# EAGLE board RangkaianPSU12V_&_RangkaianStepdown5v (EAGLE 9.6.2)
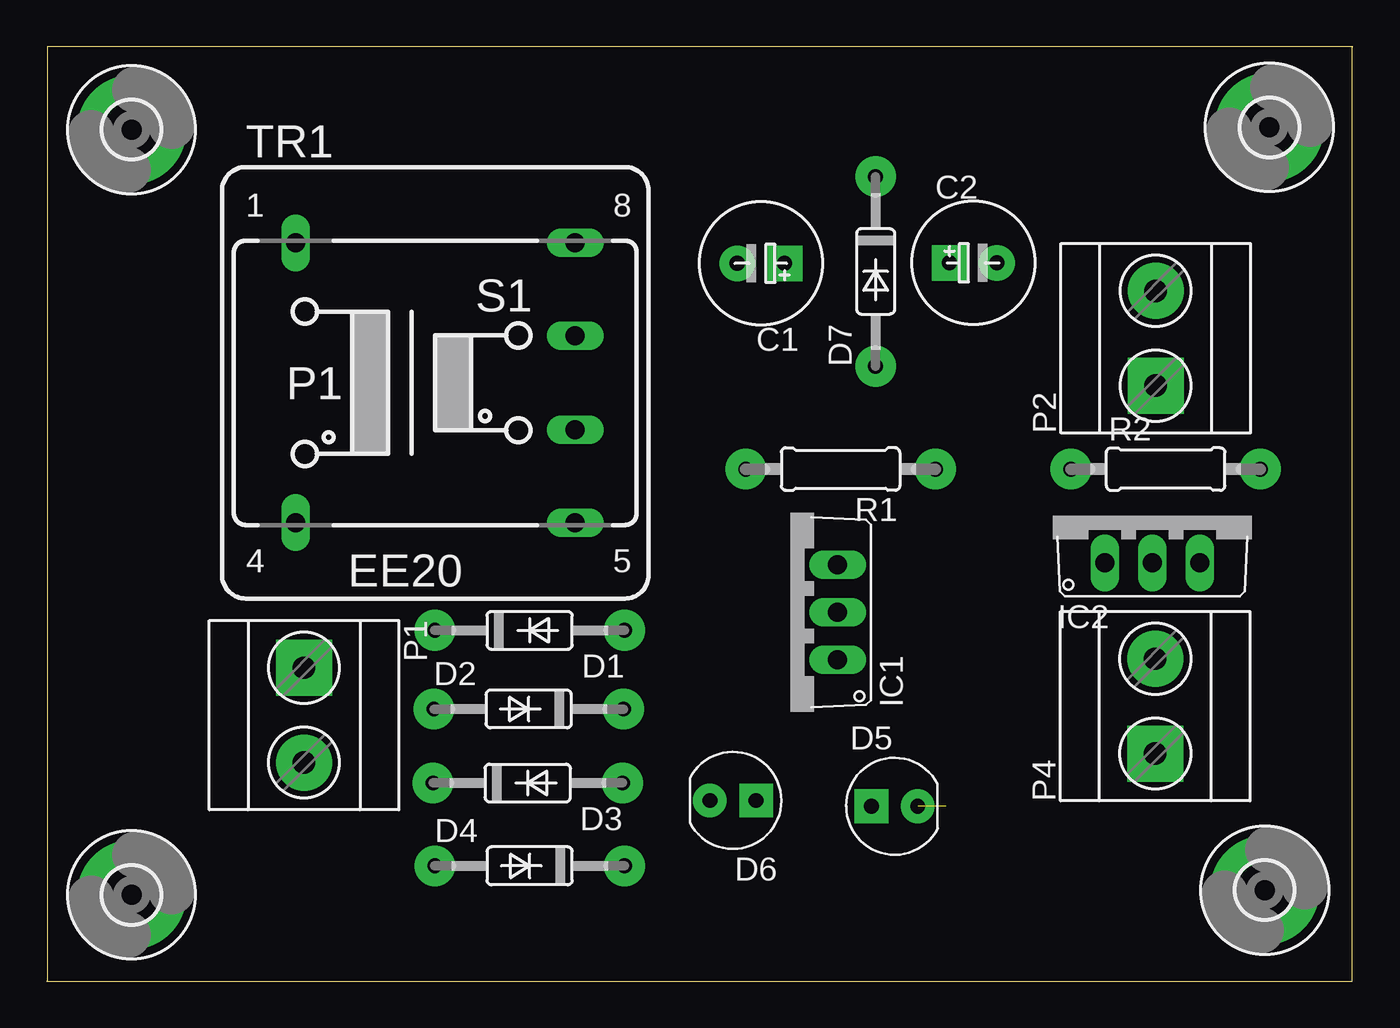
[diagram p0: board, top side]
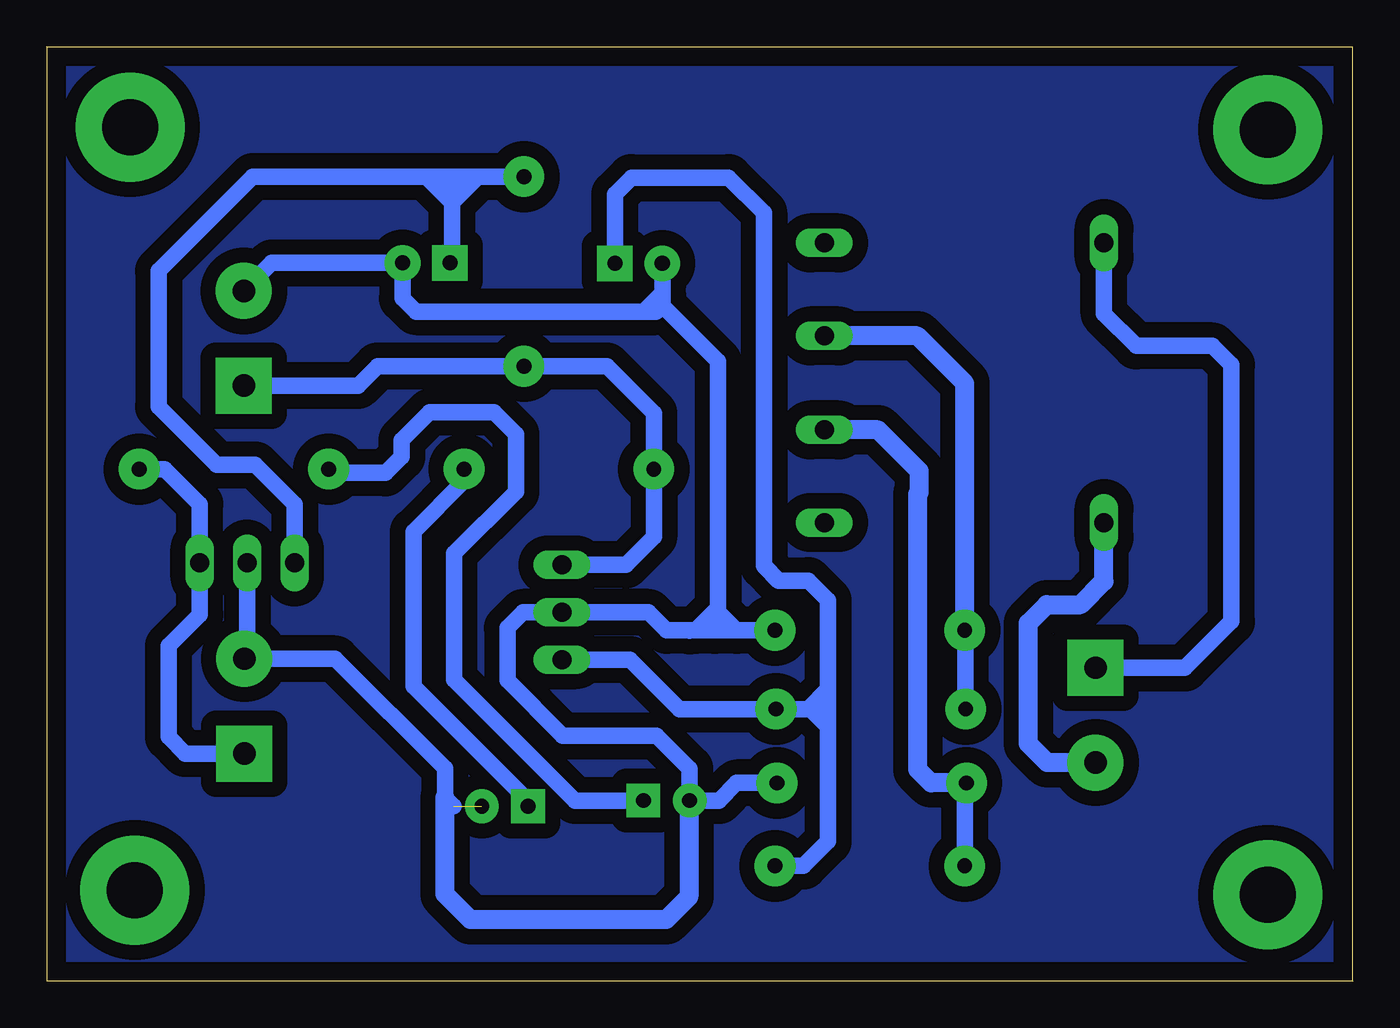
[diagram p1: board, bottom side, seen from below]

Size 70 x 50.06 mm. Coordinates in mm from the lower left corner, seen from the top.
Outline: 0,0 69.98,0 69.98,50.04 70,50.06 0.02,50.06 0.02,0.03 0,0
Copper layers (1*16): Top 0.035mm / dielectric 1.5mm / Bottom 0.035mm
Design rules "default": minimum track width 6mil, minimum drill 0.35mm, track to track 6mil, track to pad 6mil, pad to pad 6mil, via to via 6mil, smd to smd 6mil, copper to edge 40mil, drill to drill 6mil, minimum pad ring 10mil, minimum via ring 8mil, stop-mask expansion 4mil, vias tented up to drill 0mil, thermal gap 10mil

## Footprints (pad centres in the part's own frame; a part is rotated, then mirrored left to right if it is on the bottom)
E5-4 = drill 0.813 pad 1.905 square: + -1.27,0 | drill 0.813 pad 1.905: - 1.27,0
DO35-10 = drill 0.8 pad 2.184: A -5.08,0; K 5.08,0
LED = drill 0.8 pad 1.8 square: 1 -1.24,0 | drill 0.8 pad 1.8: 2 1.24,0
3,0-PAD = drill 3 pad 5.842: B3,0 0,0
TO220V = drill 1.016 long: 1 -2.54,-2.54; 2 0,-2.54; 3 2.54,-2.54
TERMINAL_2P = drill 1.2 pad 3 square: 1 -2.54,0 | drill 1.2 pad 3: 2 2.54,0
AXIAL = drill 0.8 pad 2.184: 1 -5.08,0; 2 5.08,0
EE20-1 = drill 1.016 long: 1 -7.493,7.493; 4 -7.493,-7.493; 5 7.493,-7.493; 6 7.493,-2.515; 7 7.493,2.515; 8 7.493,7.493

## Placement (x,y rotation side)
C1  1000uF  [E5-4]  38.28,38.46 180 top
C2  1000uF  [E5-4]  49.66,38.48 0 top
D1  [DO35-10]  25.88,18.8 180 top
D2  [DO35-10]  25.83,14.58 0 top
D3  [DO35-10]  25.78,10.62 180 top
D4  [DO35-10]  25.88,6.17 0 top
D5  LED-3MM  [LED]  45.44,9.37 0 top
D6  LED-3MM  [LED]  36.78,9.68 180 top
D7  [DO35-10]  44.42,38.02 90 top
H1  SPACER  [3,0-PAD]  4.55,4.62 0 top
H2  SPACER  [3,0-PAD]  4.55,45.62 0 top
H3  SPACER  [3,0-PAD]  65.53,45.75 0 top
H4  SPACER  [3,0-PAD]  65.28,4.88 0 top
IC1  7812  [TO220V]  39.85,19.76 90 top
IC2  7805  [TO220V]  59.26,24.94 0 top
P1  INPUT_220VAC  [TERMINAL_2P]  13.79,14.25 270 top
P2  12VDC  [TERMINAL_2P]  59.44,34.44 90 top
P4  5VDC  [TERMINAL_2P]  59.41,14.73 90 top
R1  1k  [AXIAL]  42.54,27.43 180 top
R2  330  [AXIAL]  59.97,27.43 0 top
TR1  [EE20-1]  20.83,32.05 0 top

## Library data of the parts
C1 C2 = 00-LKS-PROV-JATENG-A3; SPICEPREFIX: C
D1-D4 P1 P2 P4 = 00-lksprov2021-A1
D5 D6 = 00-LKS-PROV-JATENG-A3
D7 = 01
H1-H4 = LIBRARY LKS BARU
IC1 IC2 = linear
R1 R2 = 00-LKS-PROV-JATENG-A3; SPICEPREFIX: R
TR1 = trafo

## Nets
+5V: IC2.3 P4.1 R2.2
+12V: D7.A IC1.3 P2.1 R1.2
+T: D1.K D2.A TR1.7
-T: D3.K D4.A TR1.6
GND: C1.- C2.- D1.A D3.A D5.2 D6.2 IC1.2 IC2.2 P2.2 P4.2
N$1: P1.1 TR1.1
N$2: P1.2 TR1.4
N$3: C1.+ D2.K D4.K IC1.1
N$7: D5.1 R1.1
N$9: C2.+ D7.K IC2.1
N$10: D6.1 R2.1

## Tracks (layer width: path | path; a pad name or v marks a point on that pad's centre or on a via)
+5V
  Bottom 0.889: R2.2 63.68,27.43 61.8,25.55 IC2.3 61.8,19.63 63.47,17.96 63.47,13.08 62.59,12.19 P4.1
+12V
  Bottom 0.889: IC1.3 38.96,22.3 37.46,23.8 R1.2 37.46,30.43 39.98,32.94 D7.A 52.27,32.94 53.31,31.9 P2.1
+T
  Bottom 0.889: D2.A 20.75,18.75 D1.K
  Bottom 1.016: D1.K 20.8,32.03 23.34,34.57 TR1.7
-T
  Bottom 0.889: D4.A 20.8,10.52 D3.K
  Bottom 1.016: D3.K 22.61,10.62 23.32,11.33 23.32,26.11 23.24,26.19 23.24,27.33 25.45,29.54 TR1.6
A
  pour Bottom (isolate 0.813): 69.82,50.06 69.93,49.96 69.93,0.3 70.05,0.18 0.15,0.18 0.08,49.99
GND  (1 unrouted)
  Bottom 0.889: D3.A 33.02,10.62 33.96,9.68 D6.2 35.54,11.38 37.31,13.16 42.34,13.16 45.31,16.13 45.31,18.92 44.47,19.76 IC1.2 37.74,19.76 36.78,18.8 35.51,18.8 | D1.A 33.02,18.8 | 33.02,18.8 34.19,18.8 | 34.19,18.8 35.23,18.8 | 35.54,18.77 35.51,18.8 | IC2.2 59.26,17.42 P4.2 54.53,17.27 48.66,11.4 48.66,9.83 48.2,9.37 | 50.47,38.48 C2.- | C1.- 37.01,37.13 37.01,36.88 | 37.01,36.88 37.01,36.2 | 34.19,18.8 34.01,18.97 34.01,19.79 | 37.01,36.2 34.01,33.2 34.01,20.02 | 33.02,18.8 34.01,19.79 | 34.01,19.79 34.01,20.02 | 34.01,20.02 35.23,18.8 | 35.23,18.8 35.51,18.8 | P2.2 57.94,38.48 C2.- | C2.- 50.93,36.58 50.22,35.87 38.02,35.87 | 38.02,35.87 37.34,35.87 37.01,36.2 | 38.02,35.87 37.01,36.88
  Bottom 1.016: 48.66,9.83 48.66,4.67 47.29,3.3 36.8,3.3 35.59,4.52 35.59,9.63 D6.2
N$1
  Bottom 0.889: P1.1 8.99,16.79 6.5,19.28 6.5,33.02 7.52,34.04 11.61,34.04 13.33,35.76 TR1.1
N$2
  Bottom 1.016: P1.2 16.38,11.71 17.4,12.72 17.4,19.18 16.41,20.17 14.58,20.17 13.33,21.41 TR1.4
N$3
  Bottom 0.889: D2.K 29.06,14.58 28.12,13.64 | D4.K 29.44,6.17 28.12,7.49 28.12,13.64 | D2.K 36.09,14.58 38.73,17.22 IC1.1 | C1.+ 39.55,42.16 38.66,43.05 33.45,43.05 31.57,41.17 31.57,22.25 30.79,21.46 29.19,21.46 28.12,20.4 28.12,15.67 | 28.12,15.67 28.12,13.64 | D2.K 29.21,14.58 28.12,15.67
N$7
  Bottom 0.889: D5.1 44.2,9.66 50.34,15.8 50.34,24.08 47.62,26.8 R1.1
N$9
  Bottom 0.889: D7.K 46.89,43.1 | 46.89,43.1 48.28,43.1 | 48.28,43.1 49.58,43.1 | 49.58,43.1 58.95,43.1 64.01,38.05 64.01,30.79 60.88,27.66 58.83,27.66 56.72,25.55 IC2.1 | C2.+ 48.28,38.58 48.28,41.71 | 48.28,43.1 48.28,41.71 | 46.89,43.1 48.28,41.71 | 48.28,41.71 49.58,43 49.58,43.1
N$10
  Bottom 0.889: D6.1 41.68,9.68 48.16,16.15 48.16,22.91 44.86,26.21 44.86,29.31 46.02,30.48 49.48,30.48 50.98,28.98 50.98,28.09 51.84,27.23 54.69,27.23 R2.1